# EAGLE board esp12_led_improved (EAGLE 7.7.0)
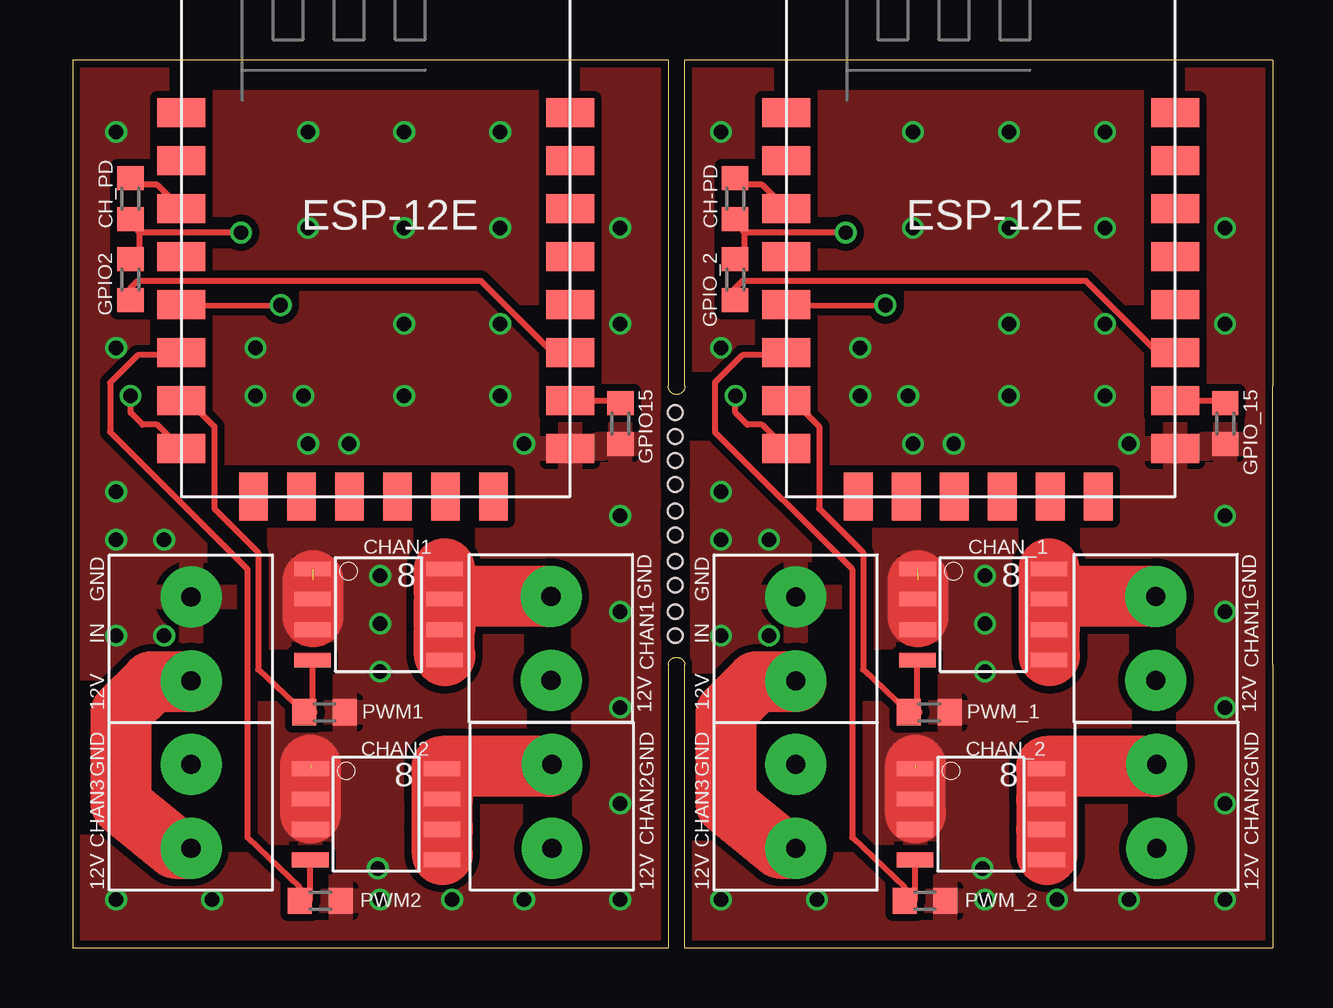
[diagram p0: board, top side]
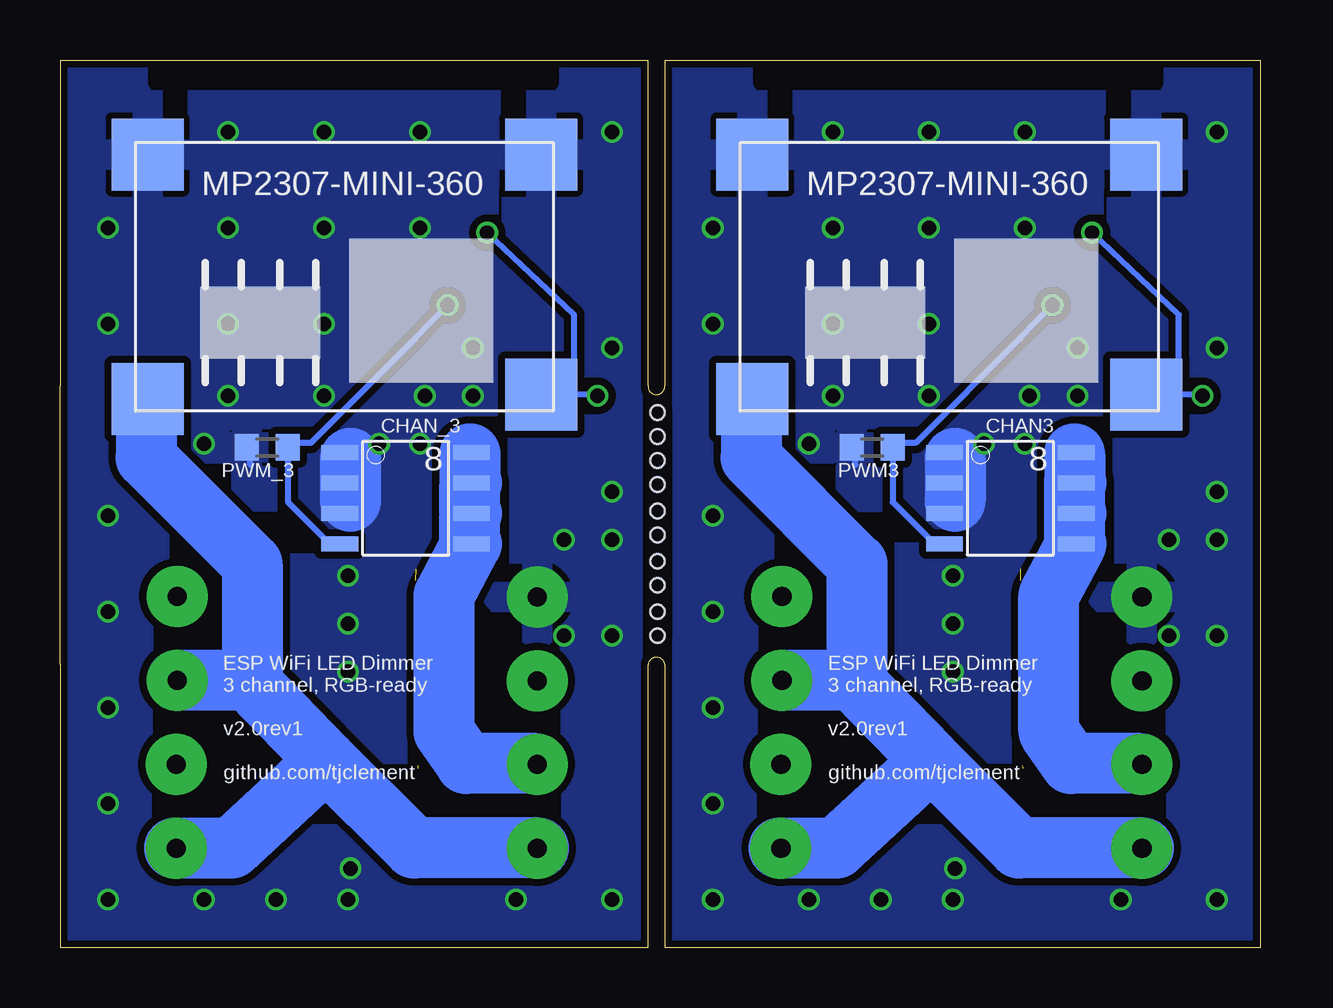
[diagram p1: board, bottom side, seen from below]

Size 50 x 37 mm. Coordinates in mm from the lower left corner, seen from the top.
Outline: 0,0 24.8,0 24.8,11.8 arc-164 25.5,11.8 25.5,0 50,0 50,11.8 50,23.4 50,37 25.5,37 25.5,23.4 arc-180 24.8,23.4 24.8,37 0,37 0,0
Copper layers (1*16): Top 0.035mm / dielectric 1.5mm / Bottom 0.035mm
Design rules "dirt_cheap_dirty_boards.v1": minimum track width 5mil, minimum drill 12mil, track to track 5mil, track to pad 5mil, pad to pad 5mil, via to via 5mil, smd to smd 0mil, copper to edge 10mil, drill to drill 10mil, minimum pad ring 10mil, minimum via ring 6mil, stop-mask expansion 2mil, vias tented up to drill 25mil, thermal gap 10mil
Holes 0.6 mm at 25.1,20.3 25.1,18.2 25.1,16.1 25.1,17.2 25.1,19.3 25.1,22.3 25.1,21.3 25.1,15.1 25.1,14 25.1,13

## Footprints (pad centres in the part's own frame; a part is rotated, then mirrored left to right if it is on the bottom)
R0603 = smd 1 x 1.1: 1 -0.85,0; 2 0.85,0
SO-8 = smd 1.524 x 0.61: 1 -2.743,1.905; 2 -2.743,0.635; 3 -2.743,-0.635; 4 -2.743,-1.905; 5 2.743,-1.905; 6 2.743,-0.635; 7 2.743,0.635; 8 2.743,1.905
KF350-2P = drill 0.8 pad 2.54: 1 -1.75,0; 2 1.75,0
MP2307-MINI-360 = smd 3 x 3: 3.3V 0.5,10.5; 12V 16.9,10.7; GND@1 16.9,0.5; GND@2 0.5,0.5
ESP8266-ESP12E = smd 2 x 1.2: 1 -7.62,5.84; 2 -7.62,3.84; 3 -7.62,1.84; 4 -7.62,-0.16; 5 -7.62,-2.16; 6 -7.62,-4.16; 7 -7.62,-6.16; 8 -7.62,-8.16; 9 8.58,-8.16; 10 8.58,-6.16; 11 8.58,-4.16; 12 8.58,-2.16; 13 8.58,-0.16; 14 8.58,1.84; 15 8.58,3.84; 16 8.58,5.84 | smd 1.2 x 2: 17 -4.62,-10.16; 18 -2.62,-10.16; 19 -0.62,-10.16; 20 1.38,-10.16; 21 3.38,-10.16; 22 5.38,-10.16

## Placement (x,y rotation side)
CH-PD  10K  [R0603]  27.59,31.22 90 top
CH_PD  10K  [R0603]  2.39,31.22 90 top
CHAN1  [SO-8]  12.73,13.88 0 top
CHAN2  [SO-8]  12.63,5.56 0 top
CHAN3  [SO-8]  10.4,18.73 0 bottom
CHAN_1  [SO-8]  37.93,13.88 0 top
CHAN_2  [SO-8]  37.83,5.56 0 top
CHAN_3  [SO-8]  35.6,18.73 0 bottom
GPIO2  10K  [R0603]  2.39,27.84 270 top
GPIO15  10K  [R0603]  22.81,21.84 270 top
GPIO_2  10K  [R0603]  27.59,27.84 270 top
GPIO_15  10K  [R0603]  48.01,21.84 270 top
OUT1  KF350-P2  [KF350-2P]  19.92,12.89 90 top
OUT2  KF350-P2  [KF350-2P]  19.96,5.89 90 top
OUT3  KF350-P2  [KF350-2P]  4.92,5.89 90 top
OUT4  KF350-P2  [KF350-2P]  45.12,12.89 90 top
OUT5  KF350-P2  [KF350-2P]  45.16,5.89 90 top
OUT6  KF350-P2  [KF350-2P]  30.12,5.89 90 top
PWM1  10K  [R0603]  10.48,9.81 0 top
PWM2  10K  [R0603]  10.3,1.95 0 top
PWM3  10K  [R0603]  16.16,20.85 180 bottom
PWM_1  10K  [R0603]  35.68,9.81 0 top
PWM_2  10K  [R0603]  35.5,1.95 0 top
PWM_3  10K  [R0603]  41.36,20.85 180 bottom
PWR1  MP2307-MINI-360  [MP2307-MINI-360]  4.25,33.56 180 bottom
PWR2  MP2307-MINI-360  [MP2307-MINI-360]  29.45,33.56 180 bottom
PWR_IN  KF350-P2  [KF350-2P]  4.92,12.87 90 top
PWR_IN1  KF350-P2  [KF350-2P]  30.12,12.87 90 top
XXX  [ESP8266-ESP12E]  12.14,28.96 0 top
XXX1  [ESP8266-ESP12E]  37.34,28.96 0 top

## Library data of the parts
CH-PD CH_PD GPIO2 GPIO15 GPIO_2 GPIO_15 PWM1-PWM3 PWM_1-PWM_3 = resistor
CHAN1-CHAN3 CHAN_1-CHAN_3 = transistor-fet
OUT1-OUT6 PWR_IN PWR_IN1 = KF350-P2
PWR1 PWR2 = MP2307-MINI-360
XXX XXX1 = ESP8266-ESP12E

## Nets
3.3V: CH_PD.1 GPIO2.1
3.3V1: CH-PD.1 GPIO_2.1
12V: OUT1.1 OUT2.1 OUT3.1 PWR1.12V PWR_IN.1
12V1: OUT4.1 OUT5.1 OUT6.1 PWR2.12V PWR_IN1.1
GND: CHAN1.1 CHAN1.2 CHAN1.3 CHAN2.1 CHAN2.2 CHAN2.3 CHAN3.1 CHAN3.2 CHAN3.3 GPIO15.2 PWM1.2 PWM2.2 PWM3.2 PWR1.GND@1 PWR1.GND@2 PWR_IN.2 XXX.9
GND1: CHAN_1.1 CHAN_1.2 CHAN_1.3 CHAN_2.1 CHAN_2.2 CHAN_2.3 CHAN_3.1 CHAN_3.2 CHAN_3.3 GPIO_15.2 PWM_1.2 PWM_2.2 PWM_3.2 PWR2.GND@1 PWR2.GND@2 PWR_IN1.2 XXX1.9
N$1: CHAN1.5 CHAN1.6 CHAN1.7 CHAN1.8 OUT1.2
N$2: CH-PD.2 XXX1.3
N$3: CH_PD.2 XXX.3
N$4: GPIO2.2 XXX.11
N$5: CHAN_1.5 CHAN_1.6 CHAN_1.7 CHAN_1.8 OUT4.2
N$6: CHAN1.4 PWM1.1 XXX.7
N$7: CHAN2.5 CHAN2.6 CHAN2.7 CHAN2.8 OUT2.2
N$8: GPIO_2.2 XXX1.11
N$9: CHAN3.5 CHAN3.6 CHAN3.7 CHAN3.8 OUT3.2
N$10: CHAN_1.4 PWM_1.1 XXX1.7
N$11: CHAN2.4 PWM2.1 XXX.6
N$12: CHAN3.4 PWM3.1 XXX.5
N$13: CHAN_2.5 CHAN_2.6 CHAN_2.7 CHAN_2.8 OUT5.2
N$14: CHAN_3.5 CHAN_3.6 CHAN_3.7 CHAN_3.8 OUT6.2
N$15: CHAN_2.4 PWM_2.1 XXX1.6
N$16: CHAN_3.4 PWM_3.1 XXX1.5
S$1: PWR1.3.3V XXX.8
S$2: GPIO15.1 XXX.10
S$3: PWR2.3.3V XXX1.8
S$4: GPIO_15.1 XXX1.10

## Tracks (layer width: path | path; a pad name or v marks a point on that pad's centre or on a via)
3.3V  (via drill 0.6)
  Top 0.254: v7,29.8 2.76,29.8 | 2.76,29.8 CH_PD.1 | 2.76,29.8 2.76,29.06 GPIO2.1
  Bottom 0.254: 3.38,23.78 3.38,26.38 v7,29.8
3.3V1  (via drill 0.6)
  Top 0.254: v32.2,29.8 27.96,29.8 | 27.96,29.8 CH-PD.1 | 27.96,29.8 27.96,29.06 GPIO_2.1
  Bottom 0.254: 28.58,23.78 28.58,26.38 v32.2,29.8
12V
  Top 0.254: 5.43,4.35 OUT3.1 | 4.93,11.08 PWR_IN.1
  Top 2.54: 4.93,11.08 3.28,11.08 2,9.8 2,6 4.26,4.14 OUT3.1
  Bottom 0.254: 21.21,22.64 PWR1.12V | 20.07,11.21 OUT1.1 19.84,10.98 | 20.04,4.15 OUT2.1 | 4.86,4.15 OUT3.1
  Bottom 2.54: 4.86,4.15 10.05,4.15 13.7,7.8 | 13.7,7.8 16.8,11 | 16.8,11 16.94,11.14 OUT1.1 | 20.04,4.15 17.65,4.15 13.7,7.8 | 21.21,22.64 21.21,20.41 16.8,16 16.8,11
12V1
  Top 0.254: 30.63,4.35 OUT6.1 | 30.13,11.08 PWR_IN1.1
  Top 2.54: 30.13,11.08 28.48,11.08 27.2,9.8 27.2,6 29.46,4.14 OUT6.1
  Bottom 0.254: 46.41,22.64 PWR2.12V | 45.27,11.21 OUT4.1 45.04,10.98 | 45.24,4.15 OUT5.1 | 30.06,4.15 OUT6.1
  Bottom 2.54: 30.06,4.15 35.25,4.15 38.9,7.8 | 38.9,7.8 42,11 | 42,11 42.14,11.14 OUT4.1 | 45.24,4.15 42.85,4.15 38.9,7.8 | 46.41,22.64 46.41,20.41 42,16 42,11
GND  (via drill 0.6)  (2 unrouted)
  Top 0.254: 11.15,9.86 PWM1.2
  Top 2.54: 9.9,5.6 9.9,7.6 | 10,15.3 10,13.8
  Bottom 0.254: CHAN3.1 12.94,20.64 12.7,20.4 | 16.86,20.12 16.86,20.81 PWM3.2
  Bottom 2.54: 12.7,20.4 12.7,18.6
  other vias: 1.8,2 5.8,2 1.8,13 12.8,2 3.8,13 12.7,3.3 15.8,2 1.8,17 18.8,2 3.8,17 1.8,19 22.8,2 12.8,11.5 12.8,13.5 12.8,15.5 22.8,6 9.8,21 22.8,10 11.5,21 1.8,34 22.8,14 17.8,23 9.8,30 18.8,21 13.8,26 22.8,18 9.8,34 13.8,30 17.8,26 13.8,34 17.8,30 22.8,26 22.8,30 17.8,34 1.8,25 9.6,23 13.8,23 7.6,23 7.6,25
  pour Bottom (isolate 0.305, rank 5): 0,37.2 25.2,37.1 24.8,-0.2 0,-0.2
  pour Top (isolate 0.305): 0,37.2 24.8,37.3 24.9,0.2 -0.2,0
GND1  (via drill 0.6)  (2 unrouted)
  Top 0.254: 36.35,9.86 PWM_1.2
  Top 2.54: 35.1,5.6 35.1,7.6 | 35.2,15.3 35.2,13.8
  Bottom 0.254: CHAN_3.1 38.13,20.64 37.9,20.4 | 42.06,20.12 42.06,20.81 PWM_3.2
  Bottom 2.54: 37.9,20.4 37.9,18.6
  other vias: 27,2 31,2 27,13 38,2 29,13 37.9,3.3 41,2 27,17 44,2 29,17 27,19 48,2 38,11.5 38,13.5 38,15.5 48,6 35,21 48,10 36.7,21 27,34 48,14 43,23 35,30 44,21 39,26 48,18 35,34 39,30 43,26 39,34 43,30 48,26 48,30 43,34 27,25 34.8,23 39,23 32.8,23 32.8,25
  pour Bottom (isolate 0.305, rank 5): 25,37.2 50.2,37.1 49.8,-0.2 25,-0.2
  pour Top (isolate 0.305): 25,37.2 49.8,37.3 49.9,0.2 24.8,0
N$1
  Top 0.254: 15.49,12.16 CHAN1.5 | 15.49,13.08 CHAN1.6 15.49,13.31 | 15.49,14.68 CHAN1.7 15.49,14.45 | 19.84,14.63 OUT1.2
  Top 2.54: 15.49,12.16 15.47,12.18 CHAN1.6 | 15.49,13.31 15.47,13.32 15.47,14 CHAN1.7 15.47,14.63 19.84,14.63 | 15.49,14.68 15.47,14.7 CHAN1.8
N$2
  Top 0.254: 30.18,30.64 29.72,30.64 XXX1.3 | XXX1.3 28.86,30.8 | XXX1.3 28.72,31.8 28,31.8 27.73,32.07 CH-PD.2
N$3
  Top 0.254: 4.98,30.64 4.52,30.64 XXX.3 | XXX.3 3.66,30.8 | XXX.3 3.52,31.8 2.8,31.8 2.53,32.07 CH_PD.2
N$4
  Top 0.254: 20.52,24.69 XXX.11 20,24.8 17,27.8 2.7,27.8 2.39,27.49 GPIO2.2
N$5
  Top 0.254: 40.69,12.16 CHAN_1.5 | 40.69,13.08 CHAN_1.6 40.69,13.31 | 40.69,14.68 CHAN_1.7 40.69,14.45 | 45.04,14.63 OUT4.2
  Top 2.54: 40.69,12.16 40.67,12.18 CHAN_1.6 | 40.69,13.31 40.67,13.32 CHAN_1.7 40.67,14.63 45.04,14.63 | 40.69,14.68 40.67,14.7 CHAN_1.8
N$6
  Top 0.254: PWM1.1 9.55,9.86 7.72,11.59 7.72,16.46 5.89,18.29 5.89,21.72 4.98,22.64 4.52,22.64 XXX.7 | 9.78,11.93 CHAN1.4 9.99,9.81
  Top 0.406: PWM1.1 9.99,9.81
N$7
  Top 0.254: 15.39,3.88 CHAN2.5 | 15.39,4.79 CHAN2.6 15.39,5.02 | 15.39,6.16 CHAN2.7 | 19.84,7.55 OUT2.2
  Top 2.54: 15.39,3.88 15.39,4.91 CHAN2.6 | 15.39,5.02 15.39,6.17 CHAN2.7 CHAN2.8 15.37,7.55 19.84,7.55
N$8
  Top 0.254: 45.72,24.69 XXX1.11 45.2,24.8 42.2,27.8 27.9,27.8 27.59,27.49 GPIO_2.2
N$9
  Bottom 0.254: 7.72,16.92 CHAN3.5 7.49,16.69 | 7.72,18.06 CHAN3.6 7.72,18.29 | 7.72,19.21 CHAN3.7 7.72,19.43 | 7.72,20.58 CHAN3.8 | 4.96,7.68 OUT3.2
  Bottom 2.54: 7.72,20.58 7.72,19.43 CHAN3.7 7.72,19.3 7.72,18.06 | 7.72,16.92 7.72,18.03 CHAN3.6 | 4.96,7.68 7.88,7.68 8.8,9 8.8,14.68 CHAN3.5
N$10
  Top 0.254: PWM_1.1 34.75,9.86 32.92,11.59 32.92,16.46 31.09,18.29 31.09,21.72 30.18,22.64 29.72,22.64 XXX1.7 | 34.98,11.93 CHAN_1.4 35.19,9.81
  Top 0.406: PWM_1.1 35.19,9.81
N$11
  Top 0.254: XXX.6 4.52,24.69 2.69,24.69 1.55,23.55 1.55,21.49 7.26,15.78 7.26,4.59 9.45,2.5 9.45,2.05 PWM2.1 9.89,1.95 CHAN2.4
N$12  (via drill 0.61)
  Top 0.254: v8.65,26.78 4.98,26.75 4.52,26.75 XXX.5
  Bottom 0.254: v8.65,26.78 10.01,25.38 14.35,21.04 15.26,21.04 PWM3.1 15.31,18.57 13.66,16.92 13.21,16.92 CHAN3.4
N$13
  Top 0.254: 40.59,3.88 CHAN_2.5 | 40.59,4.79 CHAN_2.6 40.59,5.02 | 40.59,6.16 CHAN_2.7 | 45.04,7.55 OUT5.2
  Top 2.54: 40.59,3.88 40.59,4.91 CHAN_2.6 | 40.59,5.02 40.59,6.17 CHAN_2.7 CHAN_2.8 40.57,7.55 45.04,7.55
N$14
  Bottom 0.254: 32.92,16.92 CHAN_3.5 32.69,16.69 | 32.92,18.06 CHAN_3.6 32.92,18.29 | 32.92,19.21 CHAN_3.7 32.92,19.43 | 32.92,20.58 CHAN_3.8 | 30.16,7.68 OUT6.2
  Bottom 2.54: 32.92,20.58 32.92,19.43 CHAN_3.7 32.92,19.3 32.92,18.06 | 32.92,16.92 32.92,18.03 CHAN_3.6 | 30.16,7.68 33.08,7.68 34,9 34,14.68 CHAN_3.5
N$15
  Top 0.254: XXX1.6 29.72,24.69 27.89,24.69 26.75,23.55 26.75,21.49 32.46,15.78 32.46,4.59 34.65,2.5 34.65,2.05 PWM_2.1 35.09,1.95 CHAN_2.4
N$16  (via drill 0.61)
  Top 0.254: v33.85,26.78 30.18,26.75 29.72,26.75 XXX1.5
  Bottom 0.254: v33.85,26.78 35.21,25.38 39.55,21.04 40.46,21.04 PWM_3.1 40.51,18.57 38.86,16.92 38.41,16.92 CHAN_3.4
S$1  (via drill 0.6)
  Top 0.254: XXX.8 3.52,21.8 2.9,21.8 2.4,22.3 v2.4,23
  Bottom 0.254: 4.75,23.09 PWR1.3.3V 2.46,23.06 v2.4,23
S$2
  Top 0.254: 20.52,22.86 XXX.10 22.7,22.8 GPIO15.1
S$3  (via drill 0.6)
  Top 0.254: XXX1.8 28.72,21.8 28.1,21.8 27.6,22.3 v27.6,23
  Bottom 0.254: 29.95,23.09 PWR2.3.3V 27.66,23.06 v27.6,23
S$4
  Top 0.254: 45.72,22.86 XXX1.10 47.9,22.8 GPIO_15.1

## Text on the board
tNames: GND | GND | GND | GND | IN | CHAN1 | IN | CHAN1 | 12V | 12V | 12V | 12V | GND | GND | GND | GND | CHAN3 | CHAN2 | CHAN3 | CHAN2 | 12V | 12V | 12V | 12V
bNames: ESP WiFi LED Dimmer / 3 channel, RGB-ready / / v2.0rev1 / / github.com/tjclement | ESP WiFi LED Dimmer / 3 channel, RGB-ready / / v2.0rev1 / / github.com/tjclement